# EAGLE board Step-to-Talk V2 Jig BOTTOM (EAGLE 8.4.2)
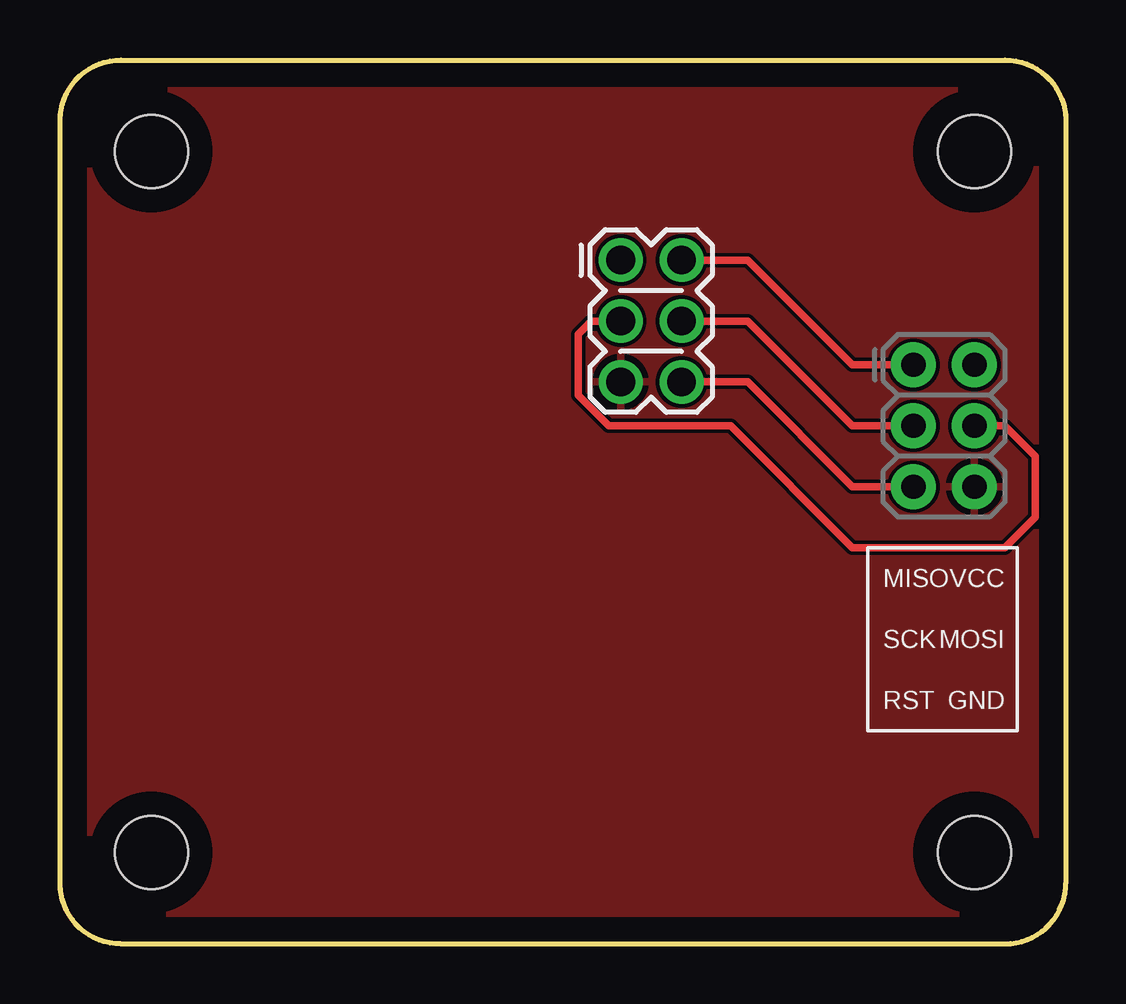
[diagram p0: board, top side]
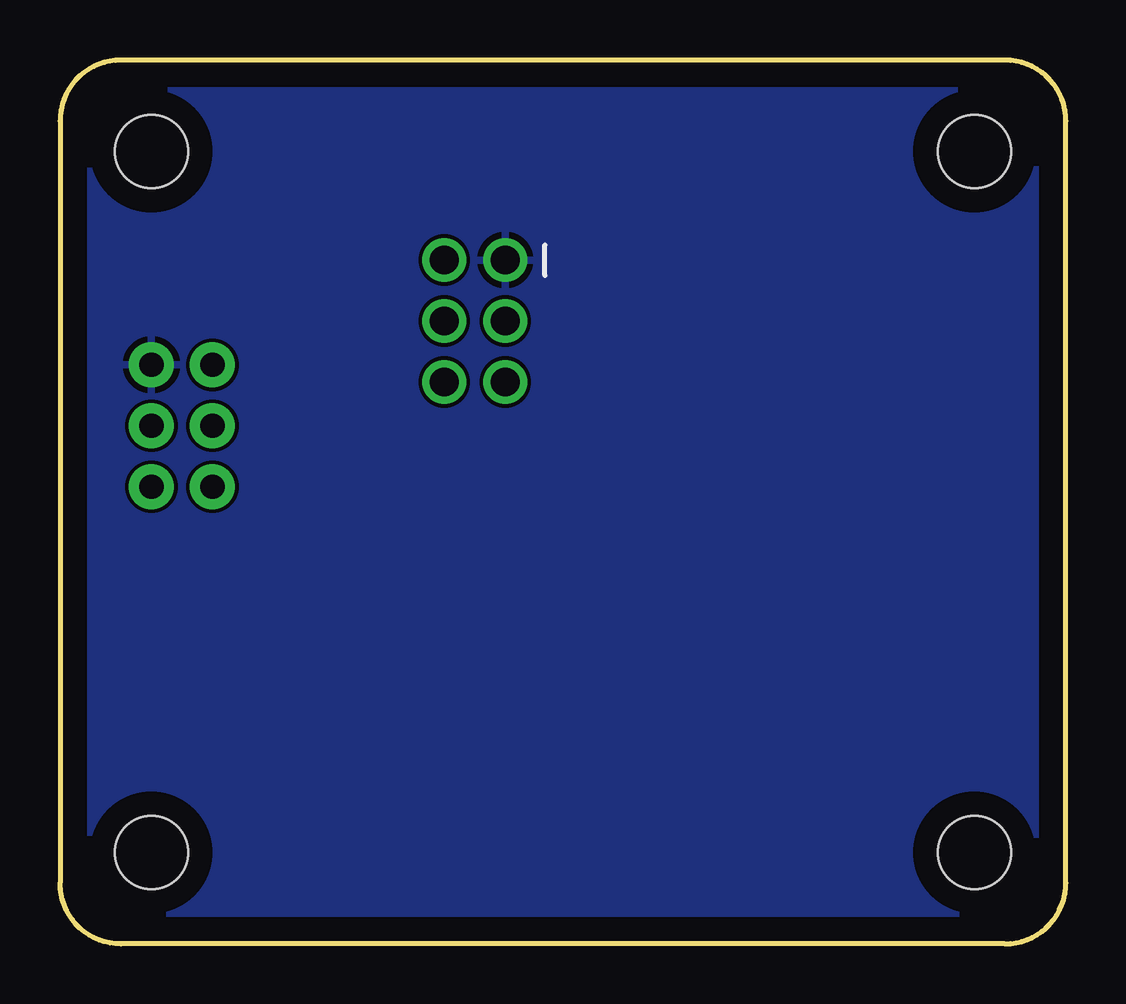
[diagram p1: board, bottom side, seen from below]

Size 41.91 x 36.83 mm. Coordinates in mm from the lower left corner, seen from the top.
Outline: 41.91,34.29 41.91,2.54 arc-90 39.37,0 2.54,0 arc-90 0,2.54 0,34.29 arc-90 2.54,36.83 39.37,36.83 arc-90 41.91,34.29
Copper layers (1*16): Top 0.035mm / dielectric 1.5mm / Bottom 0.035mm
Design rules "default": minimum track width 6mil, minimum drill 0.35mm, track to track 6mil, track to pad 6mil, pad to pad 6mil, via to via 6mil, smd to smd 6mil, copper to edge 40mil, drill to drill 6mil, minimum pad ring 10mil, minimum via ring 8mil, stop-mask expansion 4mil, vias tented up to drill 0mil, thermal gap 10mil

## Footprints (pad centres in the part's own frame; a part is rotated, then mirrored left to right if it is on the bottom)
2X3-NS = drill 1.016 pad 1.88: 1 -2.54,-1.27; 2 -2.54,1.27; 3 0,-1.27; 4 0,1.27; 5 2.54,-1.27; 6 2.54,1.27
2X3_POGO = drill 1.2 pad 1.829: P$1 0,0; P$2 0,2.54; P$3 2.54,0; P$4 2.54,2.54; P$5 5.08,0; P$6 5.08,2.54
STAND-OFF-TIGHT = hole 3.048: 0,0

## Placement (x,y rotation side)
J1  [2X3-NS]  36.83,21.59 270 top
J7  [2X3_POGO]  23.36,28.5 270 top
U$1  [STAND-OFF-TIGHT]  3.81,33.02 0 top
U$2  [STAND-OFF-TIGHT]  3.81,3.81 0 top
U$3  [STAND-OFF-TIGHT]  38.1,33.02 0 top
U$4  [STAND-OFF-TIGHT]  38.1,3.81 0 top

## Library data of the parts
J1 = SparkFun-Connectors
J7 = SparkFun-Connectors; PROD_ID: HW-11044
U$1-U$4 = SparkFun-Hardware

## Nets
GND: J1.6 J7.P$5
MISO: J1.1 J7.P$2
MOSI: J1.4 J7.P$3
RST: J1.5 J7.P$6
SCK: J1.3 J7.P$4
VCC: J1.2 J7.P$1

## Tracks (layer width: path | path; a pad name or v marks a point on that pad's centre or on a via)
GND
  pour Top: 0,36.83 41.91,36.83 41.91,0 0,0
MISO
  Top 0.305: J7.P$2 28.66,28.5 33.02,24.13 J1.1
MOSI
  Top 0.305: J7.P$3 22.14,25.95 21.59,25.4 21.59,22.86 22.86,21.59 27.94,21.59 33.02,16.51 39.37,16.51 40.64,17.78 40.64,20.32 39.37,21.59 J1.4
RST
  Top 0.305: J7.P$6 28.66,23.41 33.02,19.05 J1.5
SCK
  Top 0.305: J7.P$4 28.66,25.95 33.02,21.59 J1.3
VCC
  pour Bottom: 0,36.83 41.91,36.83 41.91,0 0,0

## Text on the board
tNames: MISO | VCC | SCK | MOSI | RST | GND